# Altium PCB LoRaWAN CO2 measurement Device_260420_2.PcbDoc
Units mil, origin at the board's own origin, x right, y up, seen from the top; angles counter-clockwise.
Board outline 6052.7 x 2607.8 mil, 2 copper layers (Top, Bottom); 64 components, 42 nets, 194 pads, 751 vias.
Unrouted connection lines stored in the file: 23.
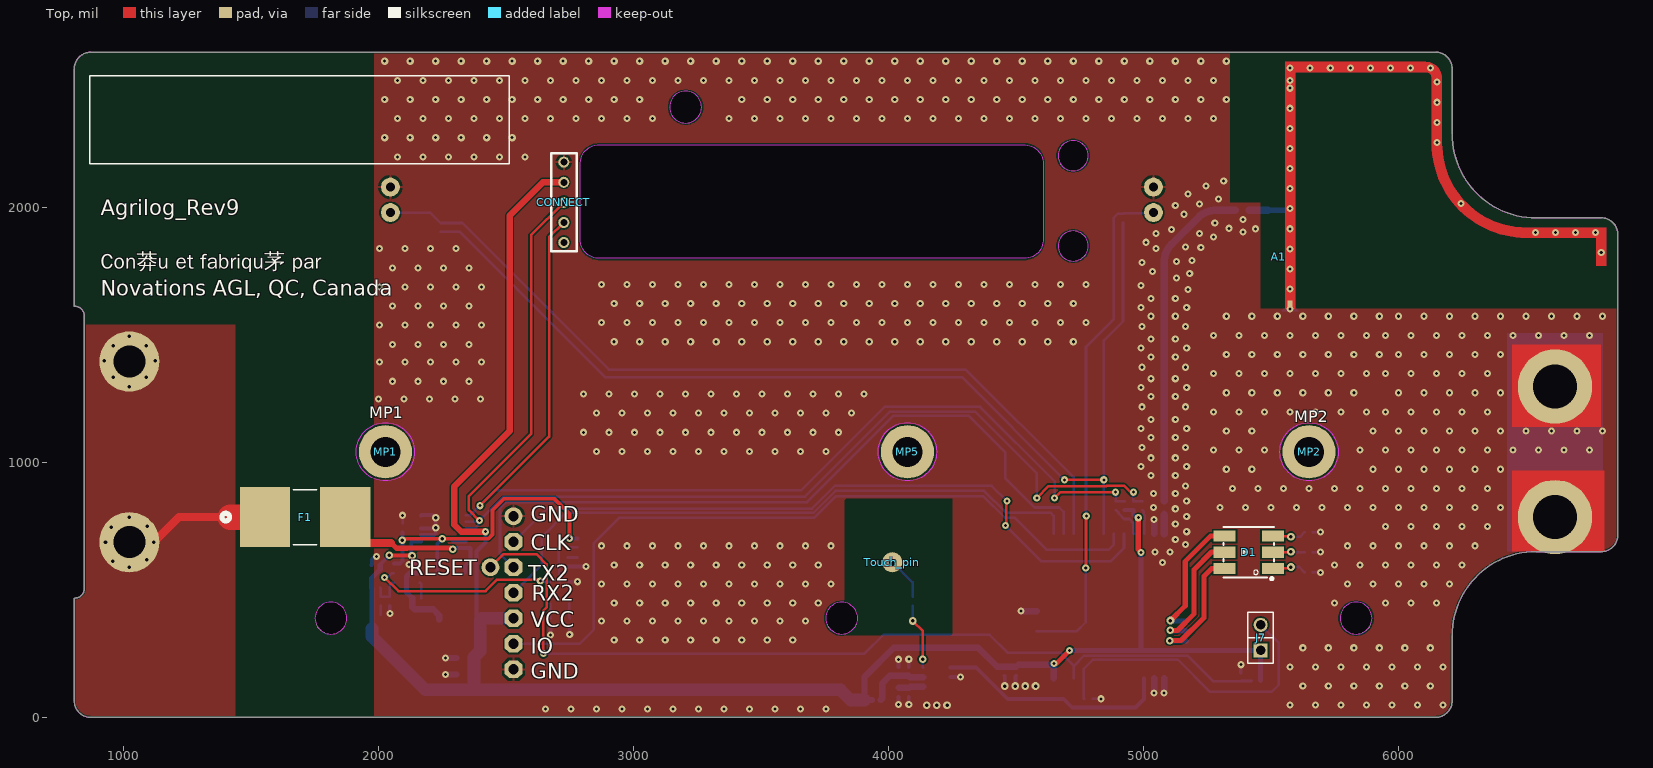
[diagram p0: Top view]
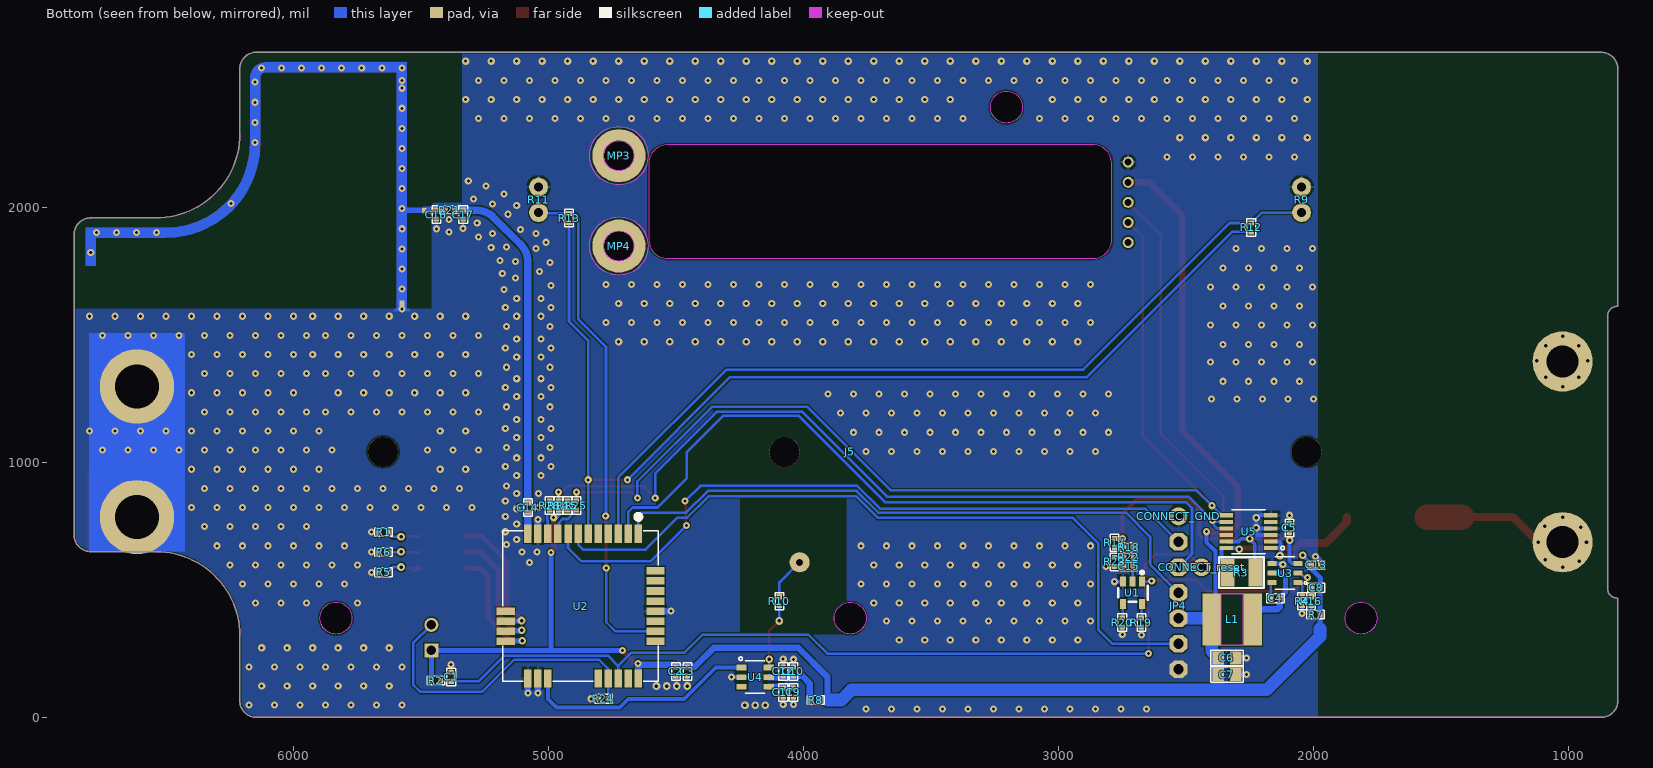
[diagram p1: Bottom view, seen from below]
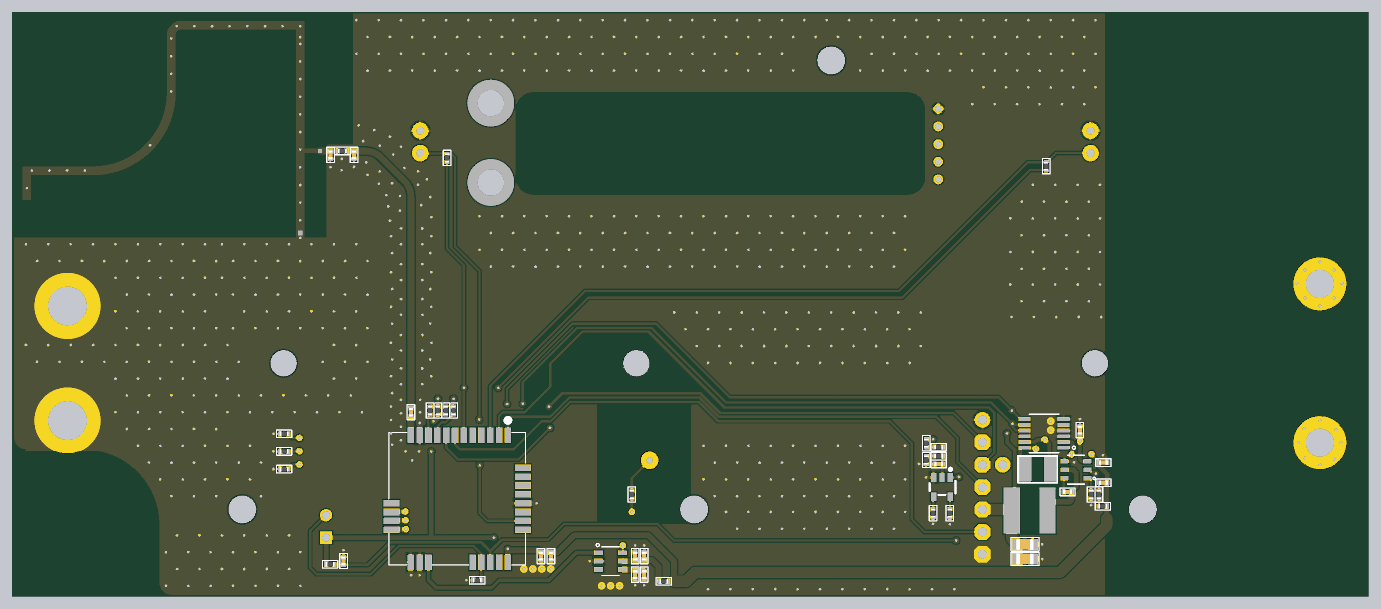
[diagram p2: 3D render of the assembled board from below, using the file's embedded part models]

## Layer stack, top to bottom
Top Solder: solder mask 0.4, Solder Resist, Dk 3.5
Top: signal copper 1.378
Dielectric 1: dielectric 12.6, FR-4, Dk 4.8
Bottom: signal copper 1.378
Bottom Solder: solder mask 0.4, Solder Resist, Dk 3.5

## Board outline
847.48,508.42 847.48,1573.73 ccw(c808.54,1575.22) 807.48,1614.17 807.48,2543.74 cw(c872.62,2545.1) 871.26,2610.24 6146.85,2610.24 cw(c6146.85,2546.51) 6210.57,2546.51 6210.57,2290.6 ccw(c6540.53,2290.6) 6540.53,1960.64 6796.44,1960.64 cw(c6796.44,1896.9) 6860.18,1896.9 6860.18,715.8 cw(c6796.44,715.8) 6796.44,652.06 6540.53,652.06 ccw(c6540.53,322.1) 6210.57,322.1 6210.57,66.19 cw(c6146.84,66.17) 6146.85,2.44 871.26,2.44 cw(c871.22,66.18) 807.48,66.14 807.48,470 ccw(c809.49,507.94)
cut-out: 5834,328.5 ccw(c5834,391) 5896.5,391 ccw(c5834,391) 5834,453.5 ccw(c5834,391) 5771.5,391 ccw(c5834,391)
cut-out: 2866.97,2246.97 4536.97,2246.97 cw(c4534.47,2174.47) 4606.97,2171.97 4606.97,1871.97 cw(c4534.47,1874.47) 4531.97,1801.97 2861.97,1801.97 cw(c2864.47,1874.47) 2791.97,1876.97 2791.97,2176.97 cw(c2864.47,2174.47)
cut-out: 1814,328.5 ccw(c1814,391) 1876.5,391 ccw(c1814,391) 1814,453.5 ccw(c1814,391) 1751.5,391 ccw(c1814,391)
cut-out: 3205,2332.5 ccw(c3205,2395) 3267.5,2395 ccw(c3205,2395) 3205,2457.5 ccw(c3205,2395) 3142.5,2395 ccw(c3205,2395)
cut-out: 3817,328.5 ccw(c3817,391) 3879.5,391 ccw(c3817,391) 3817,453.5 ccw(c3817,391) 3754.5,391 ccw(c3817,391)
cut-out: 4724.41,1791.34 ccw(c4724.41,1850.39) 4783.47,1850.39 ccw(c4724.41,1850.39) 4724.41,1909.44 ccw(c4724.41,1850.39) 4665.35,1850.39 ccw(c4724.41,1850.39)
cut-out: 4724.41,2145.66 ccw(c4724.41,2204.72) 4783.47,2204.72 ccw(c4724.41,2204.72) 4724.41,2263.78 ccw(c4724.41,2204.72) 4665.35,2204.72 ccw(c4724.41,2204.72)

## Design rules (kind name [scope] priority, off if disabled: settings)
BoardOutlineClearance mdCopperDimension [All] p1: gap=10 ignorepadtopadclearanceinfootprint=FALSE except(0: Arc-SplitContinuation Track-SplitContinuation SMDPad-SplitContinuation THPad-SplitContinuation Via-SplitContinuation Fill-SplitContinuation Poly-SplitContinuation Region-SplitContinuation Text-SplitContinuation; 6: Poly-OutlineEdge Poly-CavityEdge Poly-CutoutEdge Poly-SplitBarrior)
Clearance RF [InNetClass('RF')] p1: gap=6 ignorepadtopadclearanceinfootprint=FALSE except(7: Arc-Fill Arc-Poly Arc-Region Track-Fill Track-Poly Track-Region)
Clearance "Clearance (Same Net)" [All] p2: gap=6 ignorepadtopadclearanceinfootprint=FALSE
Clearance [All] p3: gap=6 ignorepadtopadclearanceinfootprint=FALSE
HoleSize [All] p1: absolutevalues=TRUE maxlimit=100000 minlimit=11.81 maxpercent=80.000 minpercent=20.000
HoleToHoleClearance mdDrill [All] p1: gap=6 allowstackedmicrovias=TRUE
MinimumSolderMaskSliver [All] p1 off: minsoldermaskwidth=10
PasteMaskExpansion Expansion_SMDPaste_OFF [InPadClass('SMDPaste_OFF')] p1: expansion=0
PasteMaskExpansion mlMinCreamFrame [All] p2: expansion=-1
PolygonConnect full_conn [InNetClass('full_conn')] p1: connectstyle=Direct reliefconductorwidth=10 reliefentries=4 polygonreliefangle="90 Angle" airgapwidth=10
PolygonConnect PolygonConnect_For_PolygonThermal_ON_Width160000_Gap250000 [InPolygonClass('PolygonThermal_ON_Width160000_Gap250000') vs Not IsVia] p2: connectstyle=Relief reliefconductorwidth=16 reliefentries=4 polygonreliefangle="90 Angle" airgapwidth=25
PolygonConnect PolygonConnect_For_PolygonThermal_ON_Width60000_Gap250000 [InPolygonClass('PolygonThermal_ON_Width60000_Gap250000') vs Not IsVia] p3: connectstyle=Relief reliefconductorwidth=6 reliefentries=4 polygonreliefangle="90 Angle" airgapwidth=25
PolygonConnect PolygonConnect_For_PolygonThermal_ON_Width100000_Gap250000 [InPolygonClass('PolygonThermal_ON_Width100000_Gap250000') vs Not IsVia] p4: connectstyle=Relief reliefconductorwidth=10 reliefentries=4 polygonreliefangle="90 Angle" airgapwidth=25
PolygonConnect PolygonConnect_For_PolygonThermal_ON_Width240000_Gap250000 [InPolygonClass('PolygonThermal_ON_Width240000_Gap250000') vs Not IsVia] p5: connectstyle=Relief reliefconductorwidth=24 reliefentries=4 polygonreliefangle="90 Angle" airgapwidth=25
PolygonConnect ThermalVias [IsVia] p6: connectstyle=Direct reliefconductorwidth=10 reliefentries=4 polygonreliefangle="90 Angle" airgapwidth=10
PolygonConnect [All] p7: connectstyle=Relief reliefconductorwidth=10 reliefentries=4 polygonreliefangle="90 Angle" airgapwidth=10
RoutingVias [All] p1: holewidth=11.81 width=27.81 viastyle="Through Hole" minholewidth=11.81 minwidth=27.81 maxholewidth=100 maxwidth=100
SolderMaskExpansion Expansion_SMDSolder_OFF [InPadClass('SMDSolder_OFF')] p1: expansion=0 istentingtop=FALSE
SolderMaskExpansion mlMinStopFrame [All] p2: expansion=2 istentingtop=FALSE
Width [All] p1: maxlimit=25 minlimit=10 preferedwidth=15
26 further rules are at their usual default settings.

## Classes and differential pairs
net class RF: NetA1_1 NetC14_1 RF
net class full_conn: NetF1_1
polygon class PolygonThermal_ON_Width160000_Gap250000: Polygon_1_Net_F1
pad class SMDPaste_OFF: MP1-1 MP2-1 MP3-1 MP4-1 MP5-1

## Components (designator, comment, footprint, x,y, rotation, side; value= is the part's Value field where it differs from the comment)
A1 "ANT_LORA_Alarm_Button" ANT_LORA_Alarm_Button 5425,1990 r0 top
C1 "CAPACITOR NP" sc0402 5382,161 r90 bottom
C2 "CAPACITOR NP" sc0402 4501,182.5 r270 bottom
C3 "CAPACITOR NP" sc0402 4456,182.5 r90 bottom
C4 "CAPACITOR NP" sc0402 2150,469.11 r180 bottom
C5 "CAPACITOR NP" sc0402 2095,745 r90 bottom
C6 "CAPACITOR NP" sc0805 2340,235 r180 bottom
C7 "CAPACITOR NP" sc0805 2340,170 r180 bottom
C8 "CAPACITOR NP" sc0402 1990,510 r180 bottom
C9 "CAPACITOR NP" sc0402 4040,100 r90 bottom
C10 "CAPACITOR NP" sc0402 4040,182.5 r270 bottom
C11 "CAPACITOR NP" sc0402 4080,100 r90 bottom
C12 "CAPACITOR NP" sc0402 4080,182.5 r270 bottom
C13 "CAPACITOR NP" sc0402 1990,600 r0 bottom
C14 "CAPACITOR NP" sc0402 5081,825 r270 bottom
C15 "CAPACITOR NP" sc0402 2725.5,594 r180 bottom
C16 "CAPACITOR NP" sc0402 5440,1973.5 r90 bottom
C17 "CAPACITOR NP" sc0402 5335,1973.5 r90 bottom
CONNECT "J2" circle1*5_0.7_1.106 2727.17,2179.1 r270 top
CONNECT_GND "J6" circle1*1_1.016_1.788#1 2569.16,790.83 r90 bottom
CONNECT_reset "J1" circle1*1_1.016_1.788#2 2439.53,590.55 r0 bottom
D1 "LED-RGBBRG" LED-TRICOLOR-5050 5413.39,649.61 r180 top
F1 "0031.7701.11" FUSE_0031.7701.11_SCH 1712.6,787.4 r0 top
J5 "Battery" Battery_Con 3818.9,1043.33 r0 bottom locked
J7 "CONN-2" SIP-2P 5460,315 r90 top
JP4 "PINHD-1X6CB" 1X06-CLEANBIG 2529.96,440.49 r90 bottom
L1 "SD14-6R9-R" IND_CB_SD14 2319.37,385.83 r180 bottom
MP1 "M2 x 3mm" WA-SMSI_9774030243 2027.56,1043.31 r0 top
MP2 "M2 x 3mm" WA-SMSI_9774030243 5649.61,1043.31 r0 top
MP3 "M2 x 3mm" WA-SMSI_9774030243 4724.41,2204.72 r180 bottom
MP4 "M2 x 3mm" WA-SMSI_9774030243 4724.41,1850.39 r180 bottom
MP5 "M2 x 3mm" WA-SMSI_9774030243 4074.8,1043.31 r0 top
R1 "RESISTOR" sr0402 5647.29,728.35 r180 bottom
R2 "RESISTOR" sr0402 5442,146 r180 bottom
R3 "RESISTOR" sr1210 2228.62,570 r0 bottom
R4 "RESISTOR" sr0402 2045,457.5 r90 bottom
R5 "RESISTOR" sr0402 5647.29,570.87 r180 bottom
R6 "RESISTOR" sr0402 5647.29,650 r180 bottom
R7 "RESISTOR" sr0402 1992.5,405 r0 bottom
R8 "RESISTOR" sr0402 3952.6,70 r180 bottom
R9 "10k" AXIAL-0.1 2047.24,2031.5 r90 bottom
R10 "RESISTOR" sr0402 4095,457.5 r270 bottom
R11 "10k" AXIAL-0.1 5039.37,2031.5 r90 bottom
R12 "RESISTOR" sr0402 2245,1923.13 r90 bottom
R13 "RESISTOR" sr0402 4920,1960 r90 bottom
R14 "RESISTOR" sr0402 4961,832.5 r270 bottom
R15 "RESISTOR" sr0402 4926,832.5 r270 bottom
R16 "RESISTOR" sr0402 2010,457.5 r270 bottom
R17 "RESISTOR" sr0402 2780.5,686.5 r90 bottom
R18 "RESISTOR" sr0402 2725.5,669 r0 bottom
R19 "RESISTOR" sr0402 2675.5,374 r90 bottom
R20 "RESISTOR" sr0402 2750.5,374 r90 bottom
R21 "RESISTOR" sr0402 5387.5,1991 r0 bottom
R22 "RESISTOR" sr0402 2725.5,629 r180 bottom
R23 "RESISTOR" sr0402 2780.5,611.5 r90 bottom
R24 "RESISTOR" sr0402 4785,75 r0 bottom
R25 "RESISTOR" sr0402 4891,832.5 r90 bottom
R26 "RESISTOR" sr0402 4996,832.5 r90 bottom
Touch_pin "J3" circle1*1_0.7 4015.75,610.24 r90 top
U1 "TLV840" TLV840_SOT-23-5_L2.9-W1.6-P0.95-LS2.8-BR 2673.11,534 r270 bottom
U2 "RAK3172" RAK3172 4874.71,438.52 r270 bottom locked
U3 "AP63200WU-7" TSOT26_DIO 2112,568 r0 bottom
U4 "IQS228B00000000TSR" TSOT23-6_AZQ 4190,160 r180 bottom
U5 "LTC2945IMSTRPBF" MSOP-12_MS_LIT 2255,730 r0 bottom

## Footprints (in the part's own frame and the unit in brackets; to place one, negate y for a bottom-side part, rotate by r counter-clockwise, add the part's x,y. Pads: shape width x height; smd on the part's side, far side on the other; paste and mask are expansions set on the pad)
1X06-CLEANBIG [mil] "1X06-CLEANBIG"
  oct 70x70 / inner round 64.67 / far side oct 70x70 hole 40: 1(-250,0) 2(-150,0) 3(-50,0) 4(50,0) 5(150,0) 6(250,0)
  body extent -283,-33 283,33, height 50
ANT_LORA_Alarm_Button [mil] "ANT"
  rect 18x18 smd far side paste+0 mask+2: 1(63,1)
  rect 20x22 smd far side paste+0 mask+2: 2(150,-365)
  rect 20x22 smd paste+0 mask+2: 3(150,-365)
  Top region: 130.74,-386.23 170.38,-386.22 170.38,542.37 681.92,542.37 691.14,540.53 698.95,535.31 698.95,535.31 704.17,527.5 706,518.29 706,518.29 706,518.27 706.06,262.36 734.23,120.93 814.38,1.05 814.38,1.05 934.29,-79.04 1075.73,-107.16 1075.73,-107.16 1351.06,-107.13 1351.06,-217.49 1351.32,-217.76 1390.69,-217.75 1390.96,-217.49 1390.95,-106.92 1390.95,-106.79 1390.94,-67.55 1390.68,-67.22 1351.32,-67.23 1075.73,-67.26 949.56,-42.18 842.59,29.27 842.59,29.27 771.09,136.21 745.96,262.37 745.96,262.37 745.9,518.27 745.9,518.29 741.03,542.77 727.17,563.52 727.17,563.52 706.41,577.39 681.92,582.27 681.92,582.27 130.74,582.27 130.48,582
  Bottom region: 52.46,-8.69 130.74,-8.67 130.74,-386.23 170,-386.22 170,542.63 681.92,542.63 691.24,540.78 699.14,535.5 699.14,535.5 704.42,527.6 706.27,518.28 706.27,518.28 706.27,518.27 706.32,262.36 734.48,121.03 814.57,1.24 814.56,1.24 934.39,-78.8 1075.73,-106.89 1075.73,-106.89 1351.32,-106.86 1351.32,-145.05 1351.32,-178.12 1351.32,-217.49 1390.69,-217.49 1390.69,-184.42 1390.69,-146.23 1390.69,-106.86 1390.69,-67.49 1075.73,-67.52 949.46,-42.42 842.4,29.08 842.4,29.08 770.85,136.11 745.69,262.37 745.69,262.37 745.64,518.27 740.79,542.66 726.98,563.33 726.98,563.33 706.31,577.15 681.92,582 681.92,582 130.74,582 130.74,11.01 52.45,11
AXIAL-0.1 [mil] "AXIAL-0.1"
  round 74 / inner round 0 / far side round 74 hole 35.43: P$1(-50,0) P$2(50,0)
  body extent -87,-37 87,37, height 50
Battery_Con [mm] "Battery"
  round 6 hole 3.2: 1(-71,8.999) 2(-71,-8.999)
  round 7.4 hole 4.4: 3(71,-6.501) 4(71,6.499)
circle1*1_0.7 [mm]
  round 2 / inner round 1.106 / far side round 2 hole 0.7 mask+0.102: 1(0,0)
circle1*1_1.016_1.788#1 [mil]
  round 70 hole 40: 1(0,-39.37)
circle1*1_1.016_1.788#2 [mil]
  round 70 hole 40: 1(0,0)
circle1*5_0.7_1.106 [mm]
  round 1.106 hole 0.7: 1(0,0) 2(2,0) 3(4,0) 4(6,0) 5(8,0)
  silkscreen extent -0.87,-1.27 8.88,1.27
FUSE_0031.7701.11_SCH [mil] "FUSE_0031.7701.11_SCH"
  rect 197x236 smd: 1(-157.48,0) 2(157.48,0)
  silkscreen extent -326,-108 46,108, body extent -256,-118 256,118, height 150
IND_CB_SD14 [mil] "IND_CB_SD14"
  rect 73x205 smd: 1(-80,0) 2(80,0)
  Top keep-out region: -42,103 42,103 42,-103 -42,-103
  Top keep-out region: -42,101 42,101 42,-101 -42,-101
  body extent -117,-103 117,103, height 150
LED-TRICOLOR-5050 [mil] "LED-TRICOLOR-5050"
  rect 86.61x43.31 smd: 1(-94.49,62.99) 2(-94.49,0) 3(-94.49,-62.99) 4(94.49,-62.99) 5(94.49,0) 6(94.49,62.99)
  silkscreen extent -98,-98 98,109, body extent -138,-101 138,101, height 150
MSOP-12_MS_LIT [mil] "MSOP-12_MS_LIT"
  rect 52.5x17 smd: 1(-87.25,64) 2(-87.25,38.4) 3(-87.25,12.8) 4(-87.25,-12.8) 5(-87.25,-38.4) 6(-87.25,-64) 7(87.25,-64) 8(87.25,-38.4) 9(87.25,-12.8) 10(87.25,12.8) 11(87.25,38.4) 12(87.25,64)
  silkscreen extent -140,-86 66,86, body extent -114,-72 114,72, height 50
RAK3172 [mm]
  rect 1.8x0.75 smd: 1(-7.2,5.75) 2(-7.2,4.75) 3(-7.2,3.75) 4(-7.2,2.75) 5(-7.2,1.75) 6(-7.2,0.75) 7(-7.2,-0.25) 8(-7.2,-1.25) 9(-7.2,-2.25) 10(-7.2,-3.25) 11(-7.2,-4.25) 12(-7.2,-5.25) 17(7.2,-5.25) 18(7.2,-4.25) 19(7.2,-3.25) 20(7.2,1.75) 21(7.2,2.75) 22(7.2,3.75) 23(7.2,4.75) 24(7.2,5.75)
  rect 0.75x1.8 smd: 13(0.5,-7.45) 14(1.5,-7.45) 15(2.5,-7.45) 16(3.5,-7.45) 25(3.5,7.45) 26(2.5,7.45) 27(1.5,7.45) 28(0.5,7.45) 29(-0.5,7.45) 30(-1.5,7.45) 31(-2.5,7.45) 32(-3.5,7.45)
  silkscreen extent -9.14,-7.75 7.5,7.75
sc0402 [mil] "SC0402"
  rect 20x22 smd: 1(-17.5,0) 2(17.5,0)
  silkscreen extent -34,-17 34,17, body extent -20,-10 20,10, height 20
sc0805 [mil] "SC0805"
  rect 45x50 smd mask+4: 1(35,0)
  rect 45x50 smd: 2(-35,0)
  silkscreen extent -63,-30 63,30, body extent -39,-25 39,25, height 33
SIP-2P [mil] "SIP-2P"
  rect 55x55 hole 36: 1(-50,0)
  round 55 hole 36: 2(50,0)
  silkscreen extent -100,-50 100,50
sr0402 [mil] "SR0402"
  rect 20x22 smd mask+2: 1(-17.5,0) 2(17.5,0)
  silkscreen extent -34,-17 34,17, body extent -20,-10 20,10, height 14
sr1210 [mil]
  rect 55x111 smd: 1(0,0) 2(110,0)
  silkscreen extent -33,-60 142,60
TLV840_SOT-23-5_L2.9-W1.6-P0.95-LS2.8-BR [mm]
  rect 1x0.6 smd paste+0 mask+0.05: 1(0,0) 2(0,-0.95) 3(0,-1.9) 4(2.2,-1.9) 5(2.2,0)
  silkscreen extent -1.06,-2.35 1.99,0.57
TSOT23-6_AZQ [mil] "TSOT23-6_AZQ"
  rect 39.5x22 smd: 1(-53.25,37.4) 2(-53.25,0) 3(-53.25,-37.4) 4(53.25,-37.4) 5(53.25,0) 6(53.25,37.4)
  silkscreen extent -64,-64 38,79, body extent -73,-48 73,48, height 50
TSOT26_DIO [mil] "TSOT26_DIO"
  rect 35.5x20 smd: 1(-51.25,37.4) 2(-51.25,0) 3(-51.25,-37.4) 4(51.25,-37.4) 5(51.25,0) 6(51.25,37.4)
  silkscreen extent -86,-64 38,64, body extent -69,-47 69,47, height 50
WA-SMSI_9774030243 [mil] "WA-SMSI_9774030243"
  rrect100% 208.66x208.66 smd paste+0: 1(0,0)
  Top keep-out region: 0,114.17 43.69,105.48 80.73,80.73 105.48,43.69 114.17,0 114.17,0 105.48,-43.69 80.73,-80.73 43.69,-105.48 0,-114.17 0,-114.17 -43.69,-105.48 -80.73,-80.73 -105.48,-43.69 -114.17,0 -114.17,0 -105.48,43.69 -80.73,80.73 -43.69,105.48 0,114.17
  body extent -112,-112 112,112, height 150

## Free pads (board coordinates)
  round 118.11 hole 118.11 unplated: MH1(2027.56,1043.31) MH1(4074.8,1043.31) MH1(4724.41,1850.39) MH1(4724.41,2204.72) MH1(5649.61,1043.31)
  round 125 hole 125 unplated: MH1(3205,2395) MH2(5834,391) MH3(3817,391) MH4(1814,391)

## Via types
v1: diameter 27.81, hole 11.81, Top to Bottom, tented both sides, 713 vias
v2: diameter 29.78/29.78 (per signal layer), hole 13.78, Top to Bottom, 38 vias

## Nets (pads, with @x,y where several pads share a name; then routed paths per layer and width w, separated by ;. In a path a pad name is that pad's centre, name@x,y a point inside that pad or via, vN(x,y) a via of type N, cw(c..) or ccw(c..) an arc to the next point about the centre after c; other vN are vias at no path point)
BOOT: J7.2 R24.1 U2.21 | length 1225.5
  Bottom w10: R24.1 4766.97,75.53 4766.97,154.52 U2.21 4766.44,192.75 4801.7,228 5135.43,228 5261.43,102 5503,102 5531,130 5531,294 J7.2
CVIN: F1.2 R3.2 U5.12 | length 661.9
  Top w20: 2050,686 2070.89,665.11 2112.11,665.11 2113.89,666.89 2282.46,666.89 2288.35,661 v2(2291,661)
  Top w32: F1.2 1870.08,767.9 1951.98,686 2050,686
  Bottom w15: v2(2291,661) 2295,661 2300,666 2360,666 2361,665 2361,618 2341,598 R3.2@2341,570
CX1: R10.1 Touch_pin.1 | length 168.1
  Bottom w10: Touch_pin.1 4095,530.99 R10.1
DC_RESET: U1.1 U3.2 | length 736.4
  Top w10: v1(2024.42,550.85) 2078.28,497 2421,497 2466,542 2624.18,542 2630.18,536 v1(2635,536)
  Bottom w10: v1(2024.42,550.85) 2027.83,554.26 2039.26,554.26 2053,568 U3.2 ; v1(2635,536) 2637,534 U1.1
GND: A1.2 A1.3 C1.2 C2.2 C3.1 C5.2 C6.1 C7.1 C9.1 C10.1 C11.1 C12.1 C13.1 C15.1 C16.1 C17.1 CONNECT.1 CONNECT_GND.1 J5.3 J5.4 JP4.1 R1.1 R4.1 R5.1 R6.1 R9.P$2 R11.P$2 R19.1 R20.1 R23.1 R24.2 U1.3 U2.11 U2.17 U2.18 U2.28 U3.4 U4.2 U5.3 U5.4 U5.6 | length 1272.9
  Top w15: v1(2121,601) v1@2125,605
  Bottom w10: C5.2 v1(2095,794.5) ; R24.2 v1(4833,75) ; R5.1 v1(5694.87,570.87) ; R6.1 v1(5695,650) ; R1.1 v1(5694.69,728.35)
  Bottom w15: C13.1 1975,602.5 1975,620.44 1985.1,630.55 1989.55,630.55 v1(1992,633) ; v1(2045,410.1) R4.1 ; v1(2121,601) 2124.47,601 2128.87,605.4 U3.4 ; U5.3 2218.85,717.2 2225,723.35 v2(2225,745) ; U5.4 2222.8,742.8 v2(2225,745) ; U5.6 2168.75,795 2211.46,795 2221.46,785 v2(2225,785) v2(2225,745) ; v1(2675.5,324.5) R19.1 ; C15.1 R23.1 v1(2813.5,594) ; U1.3 v1(2781.71,534) ; v1(2750.5,326.6) R20.1 ; v1(4040,52.5) C9.1 ; C10.1 v1(4040,229.91) ; v1(4080,52.5) C11.1 ; C12.1 v1(4080,230) ; U4.2 v1(4283,160) ; C3.1 4456.5,164.5 4456.5,125.5 v2(4457,125) ; v2(4497,125) 4499,127 4499,163 C2.2 ; C1.2 v1(5382,208.41)
  Bottom w25: v1(2262.59,170) C7.1 ; v1(2262.59,235) C6.1 ; v1(4520.17,418.83) U2.28 ; v1(5042.03,97.03) U2.18 ; U2.11 v1(5042.03,777.32) ; v1(5081,97) 5081.2,97.2 5081.2,154.85 U2.17
  other v1: 2655,35 2755,35 2855,35 2955,35 3055,35 3155,35 3255,35 3355,35 3455,35 3555,35 3655,35 3755,35 5575,50 5675,50 5775,50 5875,50 5975,50 6075,50 6175,50 5625,125 5725,125 5825,125 5925,125 6025,125 6125,125 5575,200 5675,200 5775,200 5875,200 5975,200 6075,200 6175,200 5625,275 5725,275 5825,275 5925,275 6025,275 6125,275 2925,305 3025,305 3125,305 3225,305 3325,305 3425,305 3525,305 3625,305 2875,380 2975,380 3075,380 3175,380 3275,380 3375,380 3475,380 3575,380 3675,380 2925,450 3025,450 3125,450 3225,450 3325,450 3425,450 3525,450 3625,450 3725,450 5750,450 5950,450 6050,450 6150,450 2875,525 2975,525 3075,525 3175,525 3275,525 3375,525 3475,525 3575,525 3675,525 3775,525 5800,525 5900,525 6000,525 6100,525 6200,525 2925,600 3025,600 3125,600 3225,600 3325,600 3425,600 3525,600 3625,600 3725,600 5750,600 5850,600 5950,600 6050,600 6150,600 6250,600 5075,610 5045,650 5105,650 2875,675 2975,675 3075,675 3175,675 3275,675 3375,675 3475,675 3575,675 3675,675 3775,675 5800,675 5900,675 6000,675 6100,675 6200,675 6300,675 5165,680 5125,700 5170,730 5950,750 6050,750 6150,750 6250,750 6350,750 5125,760 5170,790 5125,820 5040,825 5300,825 5400,825 5500,825 5600,825 5700,825 5800,825 5900,825 6000,825 6100,825 6200,825 6300,825 6400,825 5170,850 5040,880 5125,880 5350,900 5450,900 5550,900 5650,900 5750,900 5850,900 5950,900 6050,900 6150,900 6250,900 6350,900 5165,910 5030,950 5125,950 5325,975 5425,975 5900,975 6000,975 6100,975 6200,975 6300,975 6400,975 4990,985 5170,985 5030,1020 5125,1020 2855,1045 2955,1045 3055,1045 3155,1045 3255,1045 3355,1045 3455,1045 3555,1045 3655,1045 3755,1045 5275,1050 5375,1050 5475,1050 5850,1050 5950,1050 6050,1050 6150,1050 6250,1050 6350,1050 6450,1050 6550,1050 6650,1050 6750,1050 4995,1060 5165,1060 5030,1100 5125,1100 2805,1120 2905,1120 3005,1120 3105,1120 3205,1120 3305,1120 3405,1120 3505,1120 3605,1120 3705,1120 3805,1120 5325,1125 5425,1125 5900,1125 6000,1125 6100,1125 6200,1125 6300,1125 6400,1125 6500,1125 6600,1125 6700,1125 6800,1125 4990,1135 5170,1135 5030,1170 5125,1170 2855,1195 2955,1195 3055,1195 3155,1195 3255,1195 3355,1195 3455,1195 3555,1195 3655,1195 3755,1195 3855,1195 5275,1200 5375,1200 5475,1200 5575,1200 5675,1200 5775,1200 5875,1200 5950,1200 6050,1200 6150,1200 6250,1200 6350,1200 4995,1220 5165,1220 2000,1250 2100,1250 2200,1250 2300,1250 2400,1250 5030,1260 5125,1260 2805,1270 2905,1270 3005,1270 3105,1270 3205,1270 3305,1270 3405,1270 3505,1270 3605,1270 3705,1270 3805,1270 3905,1270 5325,1275 5425,1275 5525,1275 5625,1275 5725,1275 5825,1275 6000,1275 6100,1275 6200,1275 6300,1275 6400,1275 4990,1295 5170,1295 2055,1320 2155,1320 2255,1320 2355,1320 5030,1330 5125,1330 5275,1350 5375,1350 5475,1350 5575,1350 5675,1350 5775,1350 5875,1350 5950,1350 6050,1350 6150,1350 6250,1350 6350,1350 4995,1375 5165,1375 2005,1395 2105,1395 2205,1395 2305,1395 2405,1395 5030,1415 5125,1415 5325,1425 5425,1425 5525,1425 5625,1425 5725,1425 5825,1425 5925,1425 6000,1425 6100,1425 6200,1425 6300,1425 6400,1425 4990,1450 5170,1450 2055,1465 2155,1465 2255,1465 2355,1465 2925,1475 3025,1475 3125,1475 3225,1475 3325,1475 3425,1475 3525,1475 3625,1475 3725,1475 3825,1475 3925,1475 4025,1475 4125,1475 4225,1475 4325,1475 4425,1475 4525,1475 4625,1475 4725,1475 5030,1485 5125,1485 5275,1500 5375,1500 5475,1500 5575,1500 5675,1500 5775,1500 5875,1500 5950,1500 6050,1500 6150,1500 6250,1500 6350,1500 6450,1500 6550,1500 6650,1500 6750,1500 4995,1535 5165,1535 2005,1540 2105,1540 2205,1540 2305,1540 2405,1540 2875,1550 2975,1550 3075,1550 3175,1550 3275,1550 3375,1550 3475,1550 3575,1550 3675,1550 3775,1550 3875,1550 3975,1550 4075,1550 4175,1550 4275,1550 4375,1550 4475,1550 4575,1550 4675,1550 4775,1550 5030,1575 5125,1575 5325,1575 5425,1575 5525,1575 5625,1575 5725,1575 5825,1575 5925,1575 6000,1575 6100,1575 6200,1575 6300,1575 6400,1575 6500,1575 6600,1575 6700,1575 6800,1575 5575.43,1603.1 4990,1610 5170,1610 2055,1615 2155,1615 2255,1615 2355,1615 2925,1625 3025,1625 3125,1625 3225,1625 3325,1625 3425,1625 3525,1625 3625,1625 3725,1625 3825,1625 3925,1625 4025,1625 4125,1625 4225,1625 4325,1625 4425,1625 4525,1625 4625,1625 4725,1625 5030,1645 5125,1645 5175,1680 5575.43,1681.84 2005,1690 2105,1690 2205,1690 2305,1690 2405,1690 4990,1695 2875,1700 2975,1700 3075,1700 3175,1700 3275,1700 3375,1700 3475,1700 3575,1700 3675,1700 3775,1700 3875,1700 3975,1700 4075,1700 4175,1700 4275,1700 4375,1700 4475,1700 4575,1700 4675,1700 4775,1700 5130,1725 5181.69,1743.35 5035,1750 5575.43,1760.58 2055,1765 2155,1765 2255,1765 2355,1765 4995,1785 5130,1790 5190.71,1793.65 6795.51,1825.15 5575.43,1839.32 2005,1840 2105,1840 2205,1840 2305,1840 5050,1840 5225,1845 5165.69,1847.12 5010,1865 5275,1885 5050,1900 5220,1900 6537.24,1903.89 6615.98,1903.89 6694.72,1903.89 6773.46,1903.89 5390,1905 5110,1915 5440,1918 5575.43,1918.06 5335,1920 5280,1940 5390,1955 5160,1975 5575.43,1996.8 5125,2010 5220,2015 6245.9,2016.49 5295,2035 5175,2055 5575.43,2075.54 5245,2085 5315,2105 5575.43,2154.28 2075,2200 2175,2200 2275,2200 2375,2200 2475,2200 2575,2200 5575.43,2233.02 6151.41,2256.64 2025,2275 2125,2275 2225,2275 2325,2275 2425,2275 2525,2275 5575.43,2311.76 6151.41,2335.38 2075,2350 2175,2350 2275,2350 2375,2350 2475,2350 2575,2350 2675,2350 2775,2350 2875,2350 2975,2350 3075,2350 3375,2350 3475,2350 3575,2350 3675,2350 3775,2350 3875,2350 3975,2350 4075,2350 4175,2350 4275,2350 4375,2350 4475,2350 4575,2350 4675,2350 4775,2350 4875,2350 4975,2350 5075,2350 5175,2350 5275,2350 5575.43,2390.5 6151.41,2414.12 2025,2425 2125,2425 2225,2425 2325,2425 2425,2425 2525,2425 2625,2425 2725,2425 2825,2425 2925,2425 3025,2425 3425,2425 3525,2425 3625,2425 3725,2425 3825,2425 3925,2425 4025,2425 4125,2425 4225,2425 4325,2425 4425,2425 4525,2425 4625,2425 4725,2425 4825,2425 4925,2425 5025,2425 5125,2425 5225,2425 5325,2425 5575.43,2469.24 6151.41,2492.86 2075,2500 2175,2500 2275,2500 2375,2500 2475,2500 2575,2500 2675,2500 2775,2500 2875,2500 2975,2500 3075,2500 3175,2500 3275,2500 3375,2500 3475,2500 3575,2500 3675,2500 3775,2500 3875,2500 3975,2500 4075,2500 4175,2500 4275,2500 4375,2500 4475,2500 4575,2500 4675,2500 4775,2500 4875,2500 4975,2500 5075,2500 5175,2500 5275,2500 5575,2500 5575.43,2547.98 5654.17,2547.98 5732.91,2547.98 5811.65,2547.98 5890.39,2547.98 5969.13,2547.98 6047.87,2547.98 6126.61,2547.98 2025,2575 2125,2575 2225,2575 2325,2575 2425,2575 2525,2575 2625,2575 2725,2575 2825,2575 2925,2575 3025,2575 3125,2575 3225,2575 3325,2575 3425,2575 3525,2575 3625,2575 3725,2575 3825,2575 3925,2575 4025,2575 4125,2575 4225,2575 4325,2575 4425,2575 4525,2575 4625,2575 4725,2575 4825,2575 4925,2575 5025,2575 5125,2575 5225,2575 5325,2575
  other v2: 4150,50 4190,50 4230,50 4537,125 4577,125
LEDB: D1.6 U2.16 | length 493.3
  Top w20: v2(5103.75,303) 5148,303 5237.71,392.71 5237.71,555.71 5267.21,585.21 5317.49,585.21 D1.6
  Bottom w20: v2(5103.75,303) 5104.89,301.86 5166.88,301.86 U2.16
LEDG: D1.4 U2.14 | length 514.6
  Top w20: v2(5106.25,381.75) 5164,439.5 5164,614 5262.6,712.6 D1.4
  Bottom w20: v2(5106.25,381.75) 5107.4,380.61 5166.88,380.61 U2.14
LEDR: D1.5 U2.15 | length 507.6
  Top w20: v2(5105,343) 5134,343 5199.02,408.02 5199.02,582.02 5267.21,650.21 5318.3,650.21 D1.5
  Bottom w20: v2(5105,343) 5106.45,341.55 5166.56,341.55 U2.15
NetA1_1: A1.1 C16.2 R21.2 | length 73
  Bottom w29.5: 5415,1991 C16.2 A1.1
NetC4_1: C4.1 U3.6 | length 63.2
  Bottom w10: U3.6 2167.5,526.35 C4.1
NetC4_2: C4.2 L1.2 U3.5 | length 323.5
  Bottom w20: C4.2@2132.5,470.11 2110.35,492.26 2110.35,553.97 2124.38,568 U3.5
  Bottom w25: C4.2@2132.5,470.11 2132.5,434.47 2141.58,425.39 2215.37,425.39 2239.37,401.39 L1.2
NetC8_1: C8.1 R4.2 R16.1 U3.1 | length 137.7
  Bottom w10: C8.1 2008.75,508.75 2008.75,476.25 R16.1 R4.2 2045,522.6 2053,530.6 U3.1
NetC9_2: C9.2 C11.2 U4.4 | length 98.9
  Bottom w25: C9.2 C11.2 4085.1,122.6 U4.4
NetC10_2: C10.2 C12.2 R8.1 U4.5 | length 242.7
  Bottom w25: R8.1 3976,75.9 3976,135 4006,165 C10.2 C12.2 4085,160 U4.5
NetC14_1: C14.1 C17.2 R21.1 | length 1313.4
  Bottom w29.5: 5081,852.5 5081,1786.58 cw(c5181,1786.58) 5110.29,1857.29 5214.71,1961.71 cw(c5285.42,1891) 5285.42,1991 C17.2 R21.1@5360,1991
NetC15_2: C15.2 R18.1 R22.2 U1.2 | length 136
  Bottom w10: R18.1 R22.2 C15.2 2709.25,592.75 2709.25,535.25 U1.2
NetD1_1: D1.1 R5.2 | length 206.1
  Top w10: v2(5578.74,591.61) 5573.74,586.61 D1.1 ; D1.1 5516.99,577.5 5536.25,577.5 5527.14,586.61 D1.1
  Top w20: D1.1 D1.1@5512.87,591.61
  Bottom w10: v2(5578.74,591.61) 5611.14,591.61 R5.2@5631.89,570.87
NetD1_2: D1.2 R6.2 | length 125.2
  Top w10: D1.2 5577.09,649.61 v2(5578.74,651.25)
  Bottom w10: v2(5578.74,651.25) 5579.99,650 R6.2@5631.89,650
NetD1_3: D1.3 R1.2 | length 132.6
  Top w10: D1.3 5576.24,712.6 v2(5578.74,710.1)
  Bottom w10: v2(5578.74,710.1) 5613.64,710.1 R1.2@5631.89,728.35
NetF1_1: F1.1 J5.1 J5.2 | length 476.2
  Top w32: v2(1120,688.98) 1218.75,787.73 1419.19,787.73 1419.52,787.4
  Top w100: 1419.52,787.4 F1.1
  other v2: 1023.62,590.55 959,615 1092,621 930,688.98 952,747 1094,752 1023.62,787.4 1023.62,1299.21 960,1335 1090,1335 925,1400 1125,1400 960,1460 1090,1460 1023.62,1496.06
NetR7_2: R7.2 R16.2 | length 35
  Bottom w10: R7.2 R16.2
NetR10_2: R10.2 U4.6 | length 259.9
  Top w10: v2(4095,380) 4135,340 v2(4135,230)
  Bottom w10: v2(4095,380) R10.2 ; v2(4135,230) 4135,199.15 U4.6
NetR17_1: R17.1 R18.2 | length 37.5
  Bottom w10: R18.2 R17.1
NetR19_2: R19.2 U1.5 | length 56.9
  Bottom w10: U1.5 2674.3,446.18 2674.3,392.7 R19.2
NetR20_2: R20.2 U1.4 | length 57
  Bottom w10: U1.4 2749.2,446.08 2749.2,392.8 R20.2
NetR22_1: R22.1 R23.2 | length 37.5
  Bottom w10: R22.1 R23.2
NetR25_1: R25.1 U2.9 | length 135.6
  Bottom w10: R25.1 4892,815 4904,803 4904,800.44 4924.44,780 4945,780 4960,765 4960,725.27 U2.9
NetR26_1: R26.1 U2.10 | length 98.2
  Bottom w10: R26.1 4997,815 5002,810 5002,798.22 5004.9,795.32 5004.9,774.68 5002.66,772.44 U2.10
OUT: U2.19 U4.1 | length 918.5
  Bottom w15: U4.1 4344.45,197.4 4467.85,74 4688,74 4721,41 4969,41 5002.66,74.67 U2.19
RESET: C1.1 CONNECT_reset.1 R2.2 U2.22 | length 3580.6
  Top w10: CONNECT_reset.1 2490.98,642 2620,642 2660,602 2660,433.5 2647,420.5 v1(2647,252)
  Bottom w10: v1(2647,252) 3907,252 3981,326 4396.48,326 4466.59,255.89 4675.11,255.89 4727.07,203.93 ; U2.22 4727.07,203.93 ; R2.2 5423.25,144.75 5383.25,144.75 C1.1 5274.13,143.5 5173.63,244 4767.15,244 4727.07,203.93
RF: C14.2 U2.12 | length 85.7
  Bottom w10: C14.2@5081,797.5 C14.2 ; U2.12@5081.2,722.18 U2.12
  Bottom w29.5: U2.12@5081.2,722.18 5081.2,797.3
  Bottom w29.53: C14.2@5081,797.5 5081.2,797.3
RX2: JP4.4 U2.1 | length 2457.7
  Bottom w10: JP4.4 2530.49,490.49 2640.97,600.97 2640.97,709.28 2736.69,805 3707.37,805 3792.37,890 4375.46,890 4460.46,805 4635,805 4648.34,791.67 U2.1
SCL: CONNECT.4 R15.1 R25.2 U5.7 | length 4239.2
  Top w10: v1(2399,832) 2670,1103 2670,1885.72 CONNECT.4 ; v1(4652,861.5) 4675.5,885 v1(4891,885)
  Bottom w10: U5.7 2360,794 2398,832 v1(2399,832) 2459,892 3657,892 3985,1220 4360,1220 4652,928 v1(4652,861.5) ; v1(4891,885) R25.2 R15.1
SDA: CONNECT.3 R14.1 R26.2 U5.8 U5.9 | length 4577.1
  Top w10: v1@2395.48,774.52 2355,815 2355,870 2598.75,1113.75 2598.75,1893.21 CONNECT.3 ; v1(4582,863) 4627.83,908.83 4855.05,908.83 4856.13,909.9 4925.1,909.9 v1@4960,875
  Bottom w10: U5.9 2379.5,742.8 2392.59,755.89 2392.59,770.59 v1(2396,774) 2490,868 3673,868 4006,1201 4339,1201 4582,958 v1(4582,863) ; U5.8@2342.42,768.57 v1@2385.75,768.57 ; v1(4961,885) R14.1 R26.2
SWCLK: JP4.6 U2.8 | length 2747.2
  Top w10: v1(4460,755) 4462.5,757.5 4462.5,847.5 v1(4465,850)
  Bottom w10: JP4.6 2660.47,821 3700.75,821 3789.75,910 4405,910 v1(4465,850) ; v1(4460,755) 4601,614 4871,614 4923.93,666.92 U2.8
SWDIO: JP4.2 U2.7 | length 2930.3
  Bottom w10: JP4.2 2789.49,290.49 2845,346 2845,685 2945,785 3710,785 3795,870 4371.28,870 4456.28,785 4495,785 4620,660 4864.32,660 4884.56,680.23 U2.7
THERMISTORA: R9.P$1 R12.2 U2.3 | length 3330.4
  Bottom w10: R9.P$1 2203.13,1981.5 2244,1940.63 R12.2 2329.37,1940.63 2904,1366 4303,1366 4727.07,941.92 U2.3
THERMISTORB: R11.P$1 R13.2 U2.26 | length 2003.9
  Top w10: v1(4774,588) 4775,589 4775,791 v1(4776,792)
  Bottom w10: U2.26 4739.09,340.09 4774,375 v1(4774,588) ; v1(4776,792) 4775,793 4775,1455 4884,1564 4884,1962 4899.5,1977.5 R13.2 4922,1979.5 5037.37,1979.5 R11.P$1
TX2: JP4.5 U2.2 | length 2916.4
  Bottom w10: JP4.5 2477,643.45 2477,823 2500,846 3681.14,846 4020.14,1185 4315,1185 4459.18,1040.82 4459.18,939.18 4573.35,825 4670,825 4687.7,807.3 U2.2
VCC: C2.1 C3.2 C6.2 C7.2 C8.2 C13.2 CONNECT.2 J7.1 JP4.3 L1.1 R2.1 R7.1 R8.2 R14.2 R15.2 U2.24 U5.1 U5.2 | length 7656.2
  Top w15: v2(2043,638) 2044,637 2131,637 v2(2132,636)
  Top w20: v1(4649,214) 4660,214 v1(4711,265) ; v1(4980,785) 4980,661.11 4990,651.11 v1(4990,649)
  Top w25: v1(2420,730) 2325,730 2297.42,757.58 2297.42,907.42 2515,1125 2515,1970 2645.36,2100.36 CONNECT.2
  Bottom w10: J7.1@5459.5,264.5 J7.1
  Bottom w15: C13.2@2007.5,599 C13.2 2007.5,601 2043,636.5 v2(2043,638) ; v2(2132,636) 2128.66,639.34 2128.66,672.54 ; 2132.23,691.6 2133.35,691.6 ; U5.1 2166.23,667.52 2135.19,667.52 2134.59,668.11 2133.09,668.11 2128.66,672.54 ; U5.2 2133.35,691.6 ; R15.2 R14.2 4961,795.37 4968.92,787.45 4977.55,787.45 v1(4980,785) ; 2128.66,672.54 2128.66,686.91 2133.35,691.6
  Bottom w16: L1.1 2385,400.2 2385,653.5 2420,688.5 v1(2420,730)
  Bottom w20: 1975,350 R7.1 1975,506.5 1972.5,509 C8.2 1972.5,547.5 2007.5,582.5 C13.2@2007.5,599 ; v1(4711,265) 4989.88,265 ; v1(4990,649) 4989.88,648.88 4989.88,265 ; R2.1 J7.1@5459.5,264.5 ; J7.1 4989.88,265
  Bottom w25: C6.2 C6.2@2375,237.5 ; L1.1 L1.1@2404.03,390.49 ; R8.2 3906.6,70 3906.6,160.6 4021,275 4351.5,275 4426.5,200 C3.2 C2.1 4509.98,208.98 4643.22,208.98 4648.24,214 v1(4649,214) 4648.67,213.67 4648.67,155.38 U2.24
  Bottom w50: 1975,350 1975,319.27 2184.27,110 2370,110 ; C6.2 C7.2 2375,115 2370,110 ; C6.2@2375,237.5 2399.37,261.87 L1.1 ; L1.1@2404.03,390.49 JP4.3 ; 3906.6,70 3852,70 3812,110 2370,110
VCCTHERMISTORS: R12.1 R13.1 U2.6 | length 4254
  Top w10: v1(4691.27,933.73) v1(4844.73,933.73)
  Bottom w10: R12.1 2319.37,1905.63 2889,1336 4289,1336 v1(4691.27,933.73) ; v1(4844.73,933.73) 4844.96,933.51 4844.96,722.21 U2.6 ; v1@4845.19,933.73 4845.19,1480.18 4920,1555 R13.1
VIN: C5.1 R3.1 R17.2 U3.3 U5.11 | length 1350.2
  Top w15: v2(2094,696) 2099.35,696 2105.85,702.5 v2(2251.25,702.5) 2431.26,702.5 2447.41,718.65 2447.41,814.4 2492,859 2691,859 2749.59,800.4 v1(2749.59,704)
  Bottom w10: v2(2094,696) 2095,697 2094.5,697.5 2094.5,727 C5.1
  Bottom w15: U3.3 2085.4,605.4 2095,615 2095,667.11 ; R3.1@2231,570 2231,682.25 v2(2251.25,702.5) 2283.75,702.5 2294.65,691.6 U5.11 ; v1(2749.59,704) R17.2
  Bottom w16: 2095,667.11 2095,697 C5.1
pads on no net: CONNECT.5 MP1.1 MP2.1 MP3.1 MP4.1 MP5.1 U2.4 U2.5 U2.13 U2.20 U2.23 U2.25 U2.27 U2.29 U2.30 U2.31 U2.32 U4.3 U5.5 U5.10

## Polygon pours and split planes (outlines as drawn)
GND on Top "NONET_L-01_P-001" (solid, remove dead copper, pour order 6): 5458.13,1604.05 5457.83,1603.75 5457.74,1603.84 5457.74,2020.68 5339.65,2020.68 5339.63,2020.65 5339.5,2020.78 5339.5,2611.2 1985.01,2611.2 1984,2610.19 1984,3.31 1983.13,2.44 1985.57,0 6951,0 6951,1560 6906.95,1604.05
NetF1_1 on Top "Polygon_1_Net_F1" (solid, remove dead copper, pour order 2): 757,1541.75 1438,1541.75 1438,-68 757,-68
GND on Bottom "NONET_L-01_P-001" (solid, remove dead copper, pour order 5): 6859.85,1604.05 6859.55,1603.75 5457.83,1603.75 5457.83,2020.59 5457.74,2020.68 5457.71,2020.65 5339.63,2020.65 5339.63,2611.08 5339.5,2611.2 5338.54,2610.24 1983.6,2610.24 1983.6,3.01 1983.27,2.68 1983.95,2 6360,2 6895,537 6895,1599 6889.95,1604.05

## Keep-outs
Keep-Out Layer:
  the board outline again, w0.98

## Other copper
Top:
  rectangle net GND: 6445,653.28 6808.88,970
  rectangle net GND: 6445,1140 6795,1465
  pour cut-out: 4250,860 4250,330 4244.53,324.53 3834.36,324.53 3829.19,329.7 3829.19,854.19 3835,860 3840,860
Bottom:
  rectangle net GND: 6425,652.06 6802.72,1510
  pour cut-out: 4250,860 4250,326.22 4249.78,326 3832.89,326 3829.19,329.7 3830,330.51 3830,854.14 3835.86,860
  region net GND: 5595,1603.78 5601.45,1603.78 5607,1598.23 5607,1595 5544,1595 5543,1596 5549.26,1602.26 5549.26,1603.75 5555.72,1603.75 5555.74,1603.77 5555.74,1604.74 5565,1614 5585,1614 5585,1613.78 5595.03,1603.75 5601.48,1603.75

## Silkscreen, mask and mechanical layers (free items; w line width, h text height)
Top Overlay:
  lines w5: 867.5,2172.5 867.5,2517.5 2512.5,2517.5 2512.5,2172.5 867.5,2172.5
  text "Agrilog_Rev9" at 911.25,1971.25 h59.5
  text "Con莽u et fabriqu茅 par" at 911.25,1761.25 h59.5
  text "Novations AGL, QC, Canada" at 911.25,1656.25 h59.5
  text "MP1" at 1965,1160 h78.74
  text "MP2" at 5592.39,1143.97 h78.74
  text "GND" at 2598.43,769.29 h59.5
  text "CLK" at 2598.43,657.5 h59.5
  text "RESET" at 2122.05,560.24 h59.5
  text "TX2" at 2587,537 h59.5
  text "RX2" at 2601,459 h59.5
  text "VCC" at 2598.43,355 h59.5
  text "IO" at 2598.43,251.25 h59.5
  text "GND" at 2598.43,153.75 h59.5
Dimension:
  lines w0.98: 807.48,66.14 ccw(c871.22,66.18) 871.26,2.44 6146.85,2.44 ccw(c6146.84,66.17) 6210.57,66.19 6210.57,322.1 cw(c6540.53,322.1) 6540.53,652.06 6796.44,652.06 ccw(c6796.44,715.8) 6860.18,715.8 6860.18,1896.9 ccw(c6796.44,1896.9) 6796.44,1960.64 6540.53,1960.64 cw(c6540.53,2290.6) 6210.57,2290.6 6210.57,2546.51 ccw(c6146.85,2546.51) 6146.85,2610.24 871.26,2610.24 ccw(c872.62,2545.1) 807.48,2543.74 807.48,1614.17 cw(c808.54,1575.22) 847.48,1573.73 847.48,508.42 cw(c809.49,507.94) 807.48,470 807.48,66.14 ; 2791.97,1876.97 ccw(c2864.47,1874.47) 2861.97,1801.97 4531.97,1801.97 ccw(c4534.47,1874.47) 4606.97,1871.97 4606.97,2171.97 ccw(c4534.47,2174.47) 4536.97,2246.97 2866.97,2246.97 ccw(c2864.47,2174.47) 2791.97,2176.97 2791.97,1876.97
bPlace:
  circle w10: c4120,80 r22.36
  circle w10: c2080,490 r22.36
Fab Notes:
  drawing of 1056 lines, arcs and shapes, not listed
  text "All vias should be plug with soldermask." at 11460.15,3647.99 h78.74
  text "2" at 11381.12,2002.81 h50
  text "BOARD THICKNESS:   mm+/-10%" at 11897.64,2001.81 h50
  text "1.6" at 12620.5,2000.5 h50
  text "BOARD NAME:" at 9396.12,1997.81 h50
  text "LAYERS:" at 11021.12,1997.81 h50
  text "UNITS: MILS" at 9396.12,1897.81 h50
  text "OPEN WINDOWS:" at 11021.12,1897.81 h50
  text "SPELL MODE:" at 11896.12,1897.81 h50
  text "SOLDER MASK:BLACK" at 9388.46,1796.05 h50
  text "SILKSCREEN COLOR: WHITE" at 9388.46,1696.05 h50
  text "DIELECTRIC MATERIAL: FR-4" at 9396.12,1597.81 h50
  text "1. ENIG" at 10246.12,1397.81 h50
  text "PLATED TECHNICS:" at 9396.12,1272.81 h50
  text "mil width impedance 50 OHM +/-10%" at 10600,897.76 h100
  text "29.5" at 10439.89,891.05 h100
  text "L2-" at 10300,890 h100
  text "SINGLE IMPEDANCE" at 9396.12,822.81 h50
  text "[Zo]" at 9661.12,662.81 h50
  text "DIFF IMPEDANCE" at 9436.12,422.81 h50
  text "[Zo]" at 9661.12,272.81 h50
  text "SHORT NET NO." at 9491.12,92.81 h50
  text "[0]" at 9661.12,-67.19 h50
  text "Please mark:UL/94V-0" at 11096.68,-297.1 h80
  text "REQUIREMENT" at 9511.68,-299.04 h80
  text "TG Value:TG150" at 10296.68,-302.15 h80
Drill Drawing:
  circle w10: c965.62,6035.83 r20
  circle w10: c965.62,6035.83 r33.33
  circle w10: c965.62,5435.83 r33.33
  lines w10: 932.29,4819.17 948.96,4819.17 965.62,4802.5 982.29,4819.17 998.96,4819.17 982.29,4835.83 998.96,4852.5 982.29,4852.5 965.62,4869.17 948.96,4852.5 932.29,4852.5 948.96,4835.83 932.29,4819.17 ; 932.29,4985.83 965.62,4952.5 998.96,4985.83 965.62,5019.17 932.29,4985.83 ; 932.29,5102.5 965.62,5119.17 998.96,5102.5 982.29,5135.83 998.96,5169.17 965.62,5152.5 932.29,5169.17 948.96,5135.83 932.29,5102.5 ; 932.29,5252.5 965.62,5269.17 998.96,5252.5 982.29,5285.83 998.96,5319.17 965.62,5302.5 932.29,5319.17 948.96,5285.83 932.29,5252.5 ; 932.29,5619.17 998.96,5619.17 965.62,5552.5 932.29,5619.17 ; 932.29,5702.5 998.96,5702.5 998.96,5769.17 932.29,5769.17 932.29,5702.5 ; 932.29,5919.17 998.96,5919.17 965.62,5852.5 932.29,5919.17 ; 932.29,6169.17 948.96,6169.17 965.62,6152.5 982.29,6169.17 998.96,6169.17 982.29,6185.83 998.96,6202.5 982.29,6202.5 965.62,6219.17 948.96,6202.5 932.29,6202.5 948.96,6185.83 932.29,6169.17 ; 945.62,5265.83 965.62,5275.83 985.62,5265.83 975.62,5285.83 985.62,5305.83 965.62,5295.83 945.62,5305.83 955.62,5285.83 945.62,5265.83 ; 945.62,5905.83 985.62,5905.83 965.62,5865.83 945.62,5905.83 ; 945.62,6175.83 955.62,6175.83 965.62,6165.83 975.62,6175.83 985.62,6175.83 975.62,6185.83 985.62,6195.83 975.62,6195.83 965.62,6205.83 955.62,6195.83 945.62,6195.83 955.62,6185.83 945.62,6175.83
  lines w15: 872.5,4757.5 11243.63,4757.5 ; 872.5,6257.5 11243.63,6257.5 ; 1423.38,4607.5 1423.38,6407.5 ; 2023.22,4607.5 2023.22,6407.5 ; 3172.88,4607.5 3172.88,6407.5 ; 3678.76,4607.5 3678.76,6407.5 ; 4412.56,4607.5 4412.56,6407.5 ; 5602.21,4607.5 5602.21,6407.5 ; 6192.06,4607.5 6192.06,6407.5 ; 6937.86,4607.5 6937.86,6407.5 ; 7677.66,4607.5 7677.66,6407.5 ; 8531.42,4607.5 8531.42,6407.5 ; 9865.03,4607.5 9865.03,6407.5 ; 872.5,4607.5 11243.63,4607.5 11243.63,6407.5 872.5,6407.5 872.5,4607.5
  text "Symbol" at 962.5,6302.5 h72
  text "Count" at 1468.38,6302.5 h72
  text "Hole Size" at 2068.22,6302.5 h72
  text "Plated" at 3217.88,6302.5 h72
  text "Hole Type" at 3723.76,6302.5 h72
  text "Drill Layer Pair" at 4457.56,6302.5 h72
  text "Via/Pad" at 5647.21,6302.5 h72
  text "Pad Shape" at 6237.06,6302.5 h72
  text "Template" at 6982.86,6302.5 h72
  text "Description" at 7722.66,6302.5 h72
  text "Hole Tolerance (+)" at 8576.42,6302.5 h72
  text "Hole Tolerance (-)" at 9910.03,6302.5 h72
  text "2" at 1468.38,6152.5 h60
  text "36.00mil (0.914mm)" at 2068.22,6152.5 h60
  text "PTH" at 3217.88,6152.5 h60
  text "Round" at 3723.76,6152.5 h60
  text "Top - Bottom" at 4457.56,6152.5 h60
  text "Pad" at 5647.21,6152.5 h60
  text "(Mixed)" at 6237.06,6152.5 h60
  text "(Mixed)" at 6982.86,6152.5 h60
  text "2" at 1468.38,6002.5 h60
  text "125.98mil (3.200mm)" at 2068.22,6002.5 h60
  text "PTH" at 3217.88,6002.5 h60
  text "Round" at 3723.76,6002.5 h60
  text "Top - Bottom" at 4457.56,6002.5 h60
  text "Pad" at 5647.21,6002.5 h60
  text "Rounded" at 6237.06,6002.5 h60
  text "c600h320" at 6982.86,6002.5 h60
  text "2" at 1468.38,5852.5 h60
  text "173.23mil (4.400mm)" at 2068.22,5852.5 h60
  text "PTH" at 3217.88,5852.5 h60
  text "Round" at 3723.76,5852.5 h60
  text "Top - Bottom" at 4457.56,5852.5 h60
  text "Pad" at 5647.21,5852.5 h60
  text "Rounded" at 6237.06,5852.5 h60
  text "c740h440" at 6982.86,5852.5 h60
  text "4" at 1468.38,5702.5 h60
  text "35.43mil (0.900mm)" at 2068.22,5702.5 h60
  text "PTH" at 3217.88,5702.5 h60
  text "Round" at 3723.76,5702.5 h60
  text "Top - Bottom" at 4457.56,5702.5 h60
  text "Pad" at 5647.21,5702.5 h60
  text "Rounded" at 6237.06,5702.5 h60
  text "c188h90z0" at 6982.86,5702.5 h60
  text "4" at 1468.38,5552.5 h60
  text "125.00mil (3.175mm)" at 2068.22,5552.5 h60
  text "NPTH" at 3217.88,5552.5 h60
  text "Round" at 3723.76,5552.5 h60
  text "Top - Bottom" at 4457.56,5552.5 h60
  text "Pad" at 5647.21,5552.5 h60
  text "Rounded" at 6237.06,5552.5 h60
  text "c318hn318" at 6982.86,5552.5 h60
  text "5" at 1468.38,5402.5 h60
  text "118.11mil (3.000mm)" at 2068.22,5402.5 h60
  text "NPTH" at 3217.88,5402.5 h60
  text "Round" at 3723.76,5402.5 h60
  text "Top - Bottom" at 4457.56,5402.5 h60
  text "Pad" at 5647.21,5402.5 h60
  text "Rounded" at 6237.06,5402.5 h60
  text "c300hn300" at 6982.86,5402.5 h60
  text "6" at 1468.38,5252.5 h60
  text "27.56mil (0.700mm)" at 2068.22,5252.5 h60
  text "PTH" at 3217.88,5252.5 h60
  text "Round" at 3723.76,5252.5 h60
  text "Top - Bottom" at 4457.56,5252.5 h60
  text "Pad" at 5647.21,5252.5 h60
  text "Rounded" at 6237.06,5252.5 h60
  text "(Mixed)" at 6982.86,5252.5 h60
  text "8" at 1468.38,5102.5 h60
  text "40.00mil (1.016mm)" at 2068.22,5102.5 h60
  text "PTH" at 3217.88,5102.5 h60
  text "Round" at 3723.76,5102.5 h60
  text "Top - Bottom" at 4457.56,5102.5 h60
  text "Pad" at 5647.21,5102.5 h60
  text "Rounded" at 6237.06,5102.5 h60
  text "(Mixed)" at 6982.86,5102.5 h60
  text "38" at 1468.38,4952.5 h60
  text "13.78mil (0.350mm)" at 2068.22,4952.5 h60
  text "PTH" at 3217.88,4952.5 h60
  text "Round" at 3723.76,4952.5 h60
  text "Top - Bottom" at 4457.56,4952.5 h60
  text "Via" at 5647.21,4952.5 h60
  text "Rounded" at 6237.06,4952.5 h60
  text "v76h35" at 6982.86,4952.5 h60
  text "713" at 1468.38,4802.5 h60
  text "11.81mil (0.300mm)" at 2068.22,4802.5 h60
  text "PTH" at 3217.88,4802.5 h60
  text "Round" at 3723.76,4802.5 h60
  text "Top - Bottom" at 4457.56,4802.5 h60
  text "Via" at 5647.21,4802.5 h60
  text "Rounded" at 6237.06,4802.5 h60
  text "v71h30m0mx0" at 6982.86,4802.5 h60
  text "784 Total" at 1468.38,4652.5 h60
Document:
  drawing of 203 lines, arcs and shapes, not listed
Reference:
  drawing of 315 lines, arcs and shapes, not listed
a-dxf-t:
  drawing of 2992 lines, arcs and shapes, not listed
a-dxf-inter:
  drawing of 2996 lines, arcs and shapes, not listed

## Dimensions
1157.8,1359.54 to 6080,1330 on Fab Notes (Mech16)
807.5,1404.77 to 1155,1195 on Fab Notes (Mech16)
2810,1880 to 3810,1255 on Fab Notes (Mech16)
4555,2250 to 4550,1805 on Fab Notes (Mech16)
2810,2180 to 4625,2175 on Fab Notes (Mech16)

## Text inside footprints (layer, text, board x,y; h text height)
F1: Measures "0.205in/5.207mm" at 758.6,775.4 h21.25; Measures "0.102in/2.604mm" at 708.6,826.4 h21.25; Measures "0in/0mm" at 2068.6,775.4 h21.25; Measures "0.472in/11.989mm" at 1542.6,1335.4 h21.25; Measures "0.315in/8mm" at 1358.6,1010.4 h21.25; Measures "Alt Padstyle 2: OX90Y60D30P" at 1129.6,-15.6 h42.5; Measures "Alt Padstyle 1: OX60Y90D30P" at 1129.6,59.4 h42.5; Measures "Right Mtg Padstyle: RX50Y100D30P" at 1023.6,134.4 h42.5; Measures "Left Mtg Padstyle: RX50Y100D30P" at 1045.6,209.4 h42.5; Measures "3rd Mtg Padstyle: RX100Y50D40P" at 1053.6,284.4 h42.5; Measures "2nd Mtg Padstyle: RX50Y100D40P" at 1053.6,359.4 h42.5; Measures "1st Mtg Padstyle: RX80Y110D50P" at 1061.6,434.4 h42.5; Measures "Default Padstyle: RX197Y236D0T" at 1068.6,509.4 h42.5
L1: Measures "0.059in/1.499mm" at 2405.37,137.83 h21.25; Measures "0.205in/5.207mm" at 2478.37,607.83 h21.25; Measures "0.205in/5.207mm" at 2097.37,373.83 h21.25; Measures "Alt 2 Padstyle: OX90Y60D30P" at 2902.37,-106.17 h42.5; Measures "Alt 1 Padstyle: OX60Y90D30P" at 2902.37,-46.17 h42.5; Measures "Default Padstyle: RX73Y205D0T" at 2940.37,13.83 h42.5
U3: Measures "Default Padstyle: RX35p5Y20D0T" at 1468,827 h42.5 r180; Measures "Pin One Padstyle: RX35p5Y20D0T" at 1453,887 h42.5 r180; Measures "Alt 1 Padstyle: OX60Y90D30P" at 1529,1067 h42.5 r180; Measures "Alt 2 Padstyle: OX90Y60D30P" at 1529,1127 h42.5 r180; Measures "0.067in/1.702mm" at 1953,414 h21.25 r180; Measures "0.11in/2.794mm" at 1964,339 h21.25 r180; Measures "0.118in/2.997mm" at 2266,580 h21.25 r180; Measures "0.037in/0.95mm" at 1645,562 h21.25 r180; Measures "0.02in/0.508mm" at 1919,747 h21.25 r180
U4: Measures "Default Padstyle: RX39p5Y22D0T" at 4834,-99 h42.5; Measures "Pin One Padstyle: RX39p5Y22D0T" at 4849,-159 h42.5; Measures "Alt 1 Padstyle: OX60Y90D30P" at 4773,-339 h42.5; Measures "Alt 2 Padstyle: OX90Y60D30P" at 4773,-399 h42.5; Measures "0.067in/1.702mm" at 4349,314 h21.25; Measures "0.118in/2.997mm" at 4349,389 h21.25; Measures "0.118in/2.997mm" at 4036,148 h21.25; Measures "0.037in/0.95mm" at 4659,166 h21.25; Measures "0.02in/0.508mm" at 4387,-19 h21.25
U5: Document "Default Padstyle: RX52p5Y17D0T" at 1611,1012 h42.5 r180; Document "Pin One Padstyle: RX52p5Y17D0T" at 1596,1072 h42.5 r180; Document "Alt 1 Padstyle: OX60Y90D30P" at 1672,1252 h42.5 r180; Document "Alt 2 Padstyle: OX90Y60D30P" at 1672,1312 h42.5 r180; Document "0.122in/3.099mm" at 2096,554 h21.25 r180; Document "0.199in/5.055mm" at 2096,478 h21.25 r180; Document "0.163in/4.14mm" at 2436,742 h21.25 r180; Document "0.026in/0.65mm" at 1752,691 h21.25 r180; Document "0.027in/0.686mm" at 2010,932 h21.25 r180; Document "Default Padstyle: RX52p5Y17D0T" at 1611,1012 h42.5 r180; Document "Pin One Padstyle: RX52p5Y17D0T" at 1596,1072 h42.5 r180; Document "Alt 1 Padstyle: OX60Y90D30P" at 1672,1252 h42.5 r180; Document "Alt 2 Padstyle: OX90Y60D30P" at 1672,1312 h42.5 r180; Document "0.122in/3.099mm" at 2096,554 h21.25 r180; Document "0.199in/5.055mm" at 2096,478 h21.25 r180; Document "0.163in/4.14mm" at 2436,742 h21.25 r180; Document "0.026in/0.65mm" at 1752,691 h21.25 r180; Document "0.027in/0.686mm" at 2010,932 h21.25 r180